# EAGLE board Lumix_driver (EAGLE 5.11)
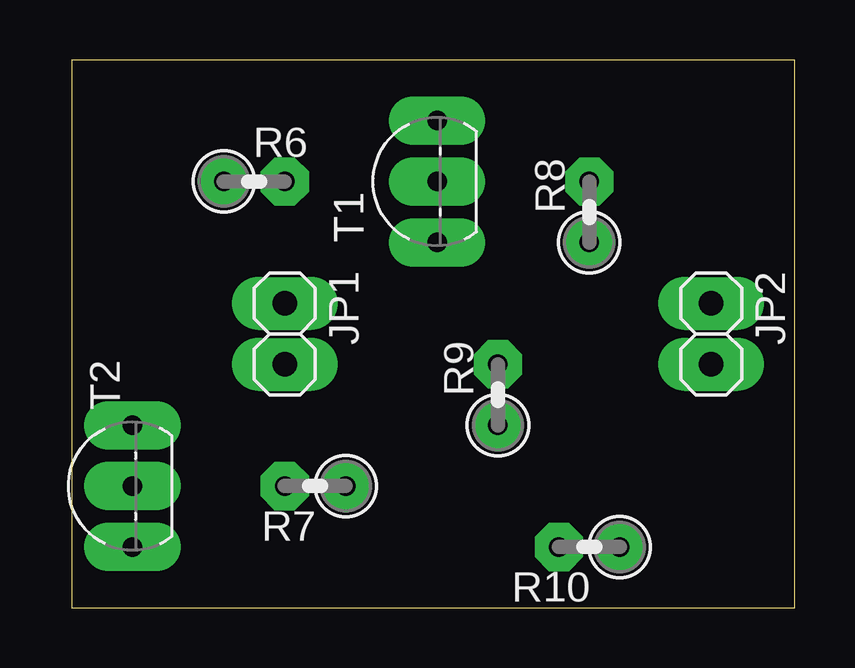
[diagram p0: board, top side]
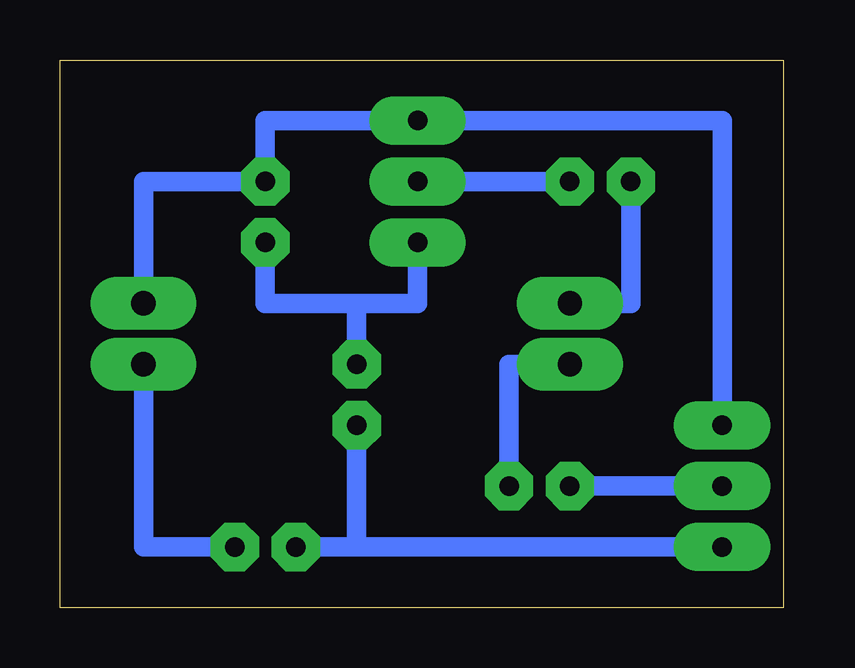
[diagram p1: board, bottom side, seen from below]

Size 30.15 x 22.85 mm. Coordinates in mm from the lower left corner, seen from the top.
Outline: 0,0 30.15,0 30.15,22.85 0,22.85 0,0
Copper layers (1*16): Top 0.035mm / dielectric 1.5mm / Bottom 0.035mm
Design rules "hobby": minimum track width 0.8mm, minimum drill 0.8mm, track to track 0.8mm, track to pad 0.8mm, pad to pad 0.45mm, via to via 0.8mm, smd to smd 8mil, copper to edge 10mil, drill to drill 8mil, minimum pad ring 0.6mm, minimum via ring 0.6mm, stop-mask expansion 0mil, vias tented up to drill 0mil, thermal gap 10mil

## Footprints (pad centres in the part's own frame; a part is rotated, then mirrored left to right if it is on the bottom)
1X02 = drill 1.016 long: 1 -1.27,0; 2 1.27,0
0207/2V = drill 0.813 octagon: 1 -1.27,0; 2 1.27,0
TO92-EBC-OVAL = drill 0.813 long: B 0,-1.27; C 2.54,-1.27; E -2.54,-1.27

## Placement (x,y rotation side)
JP1  JP1  [1X02]  8.89,11.43 270 top
JP2  JP2  [1X02]  26.67,11.43 270 top
R6  1k  [0207/2V]  7.62,17.78 0 top
R7  1k  [0207/2V]  10.16,5.08 180 top
R8  36k  [0207/2V]  21.59,16.51 90 top
R9  2.7k  [0207/2V]  17.78,8.89 90 top
R10  2k  [0207/2V]  21.59,2.54 180 top
T1  2N2222  [TO92-EBC-OVAL]  13.97,17.78 90 top
T2  2N2222  [TO92-EBC-OVAL]  1.27,5.08 90 top

## Library data of the parts
JP1 JP2 = pinhead
R6-R10 = resistor
T1 T2 = adafruit

## Nets
N$1: JP2.1 R8.2 T1.C T2.C
N$2: R6.2 T1.B
N$3: R7.2 T2.B
N$4: R9.1 R10.2 T2.E
N$5: R8.1 R9.2 T1.E
N$6: JP2.2 R10.1
N$7: JP1.1 R6.1
N$8: JP1.2 R7.1

## Tracks (layer width: path | path; a pad name or v marks a point on that pad's centre or on a via)
N$1
  Bottom 0.813: T2.C 2.54,20.32 T1.C 21.59,20.32 R8.2 26.67,17.78 JP2.1
N$2
  Bottom 0.813: R6.2 T1.B
N$3
  Bottom 0.813: T2.B R7.2
N$4
  Bottom 0.813: T2.E 17.78,2.54 | 17.78,2.54 R10.2 | 17.78,2.54 R9.1
N$5
  Bottom 0.813: T1.E 15.24,12.7 17.78,12.7 | R9.2 17.78,12.7 | 17.78,12.7 21.59,12.7 R8.1
N$6
  Bottom 0.813: R10.1 26.67,2.54 JP2.2
N$7
  Bottom 0.813: R6.1 6.35,12.7 JP1.1
N$8
  Bottom 0.813: R7.1 11.43,10.16 JP1.2